# Altium PCB Gateway.PcbDoc
Units mm, origin at the board's own origin, x right, y up, seen from the top; angles counter-clockwise.
Board outline 74.09 x 59.44 mm, 2 copper layers (Top Layer, Bottom Layer); 20 components, 15 nets, 102 pads, 9 vias.
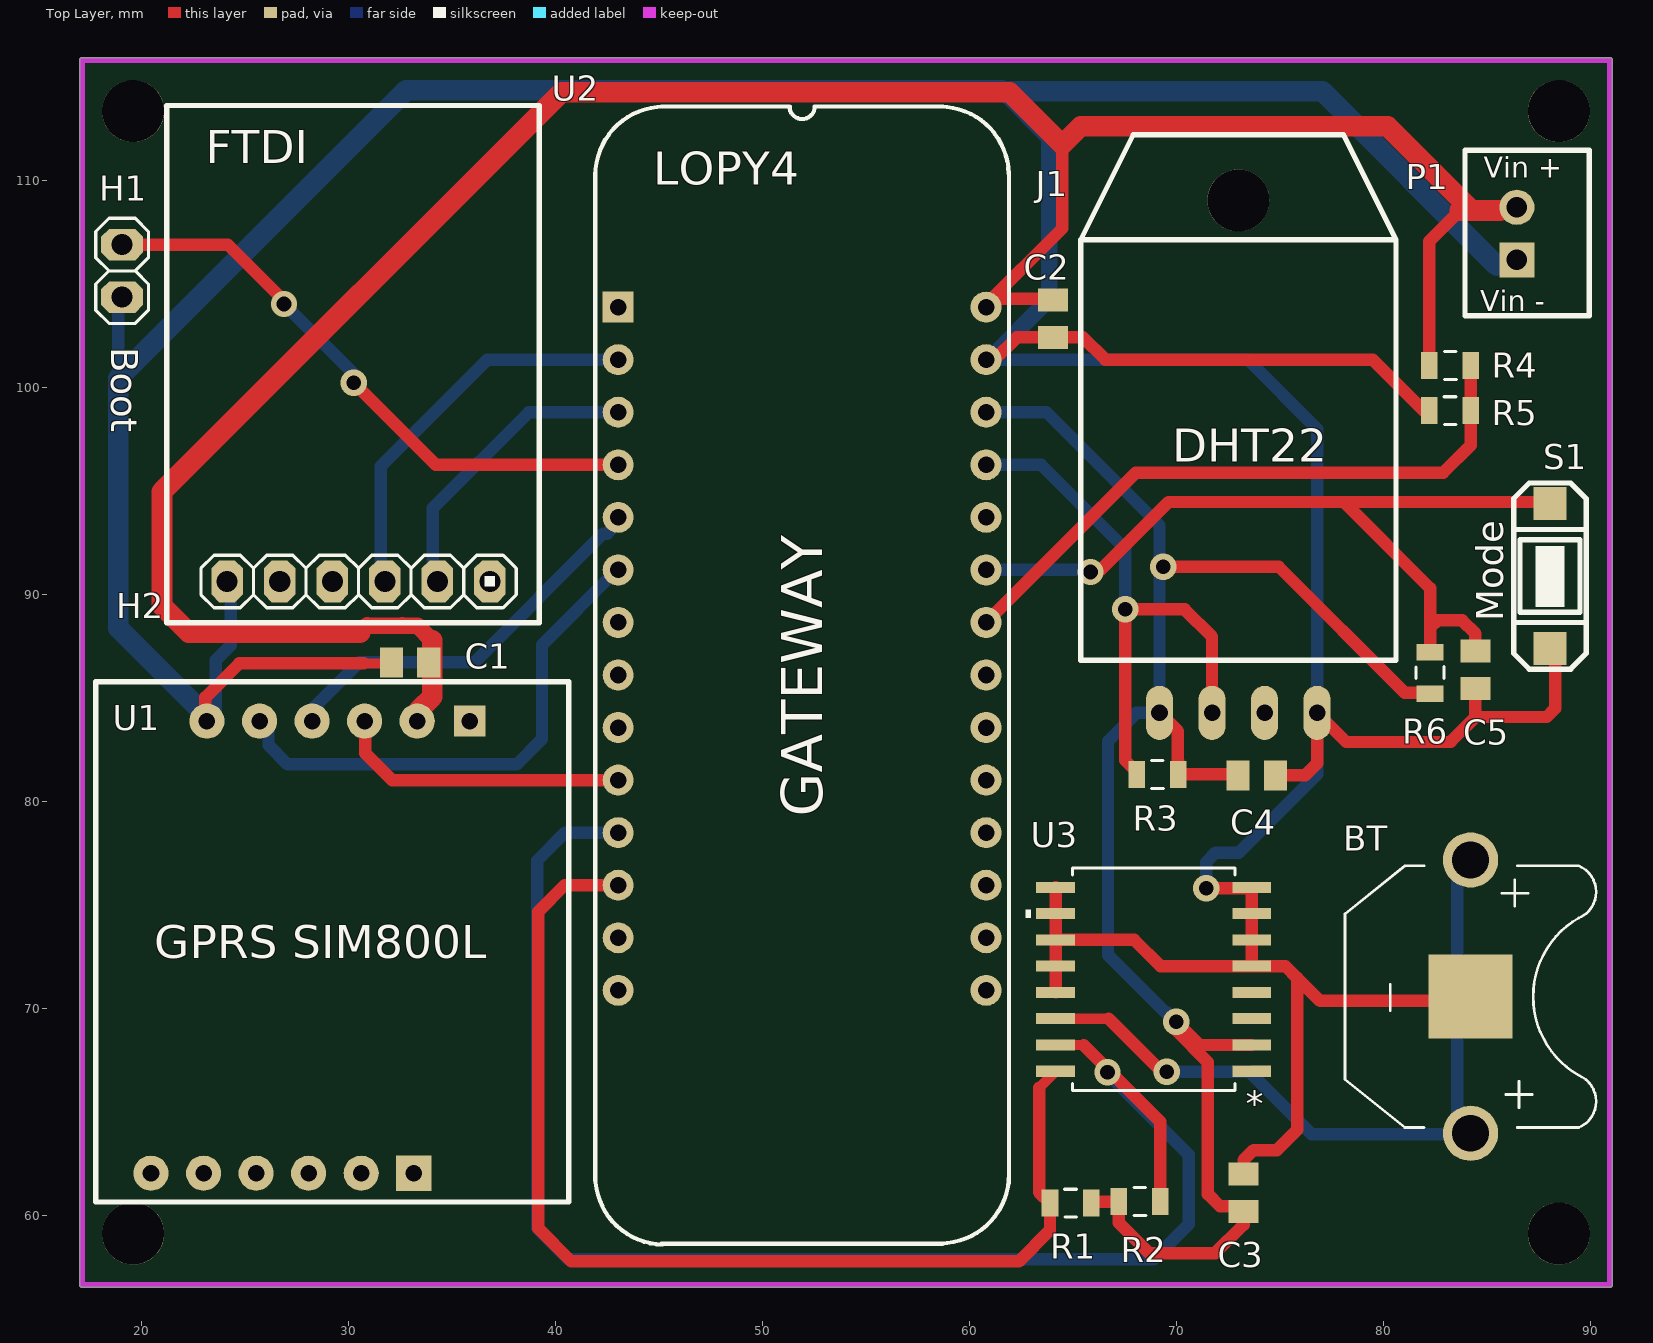
[diagram p0: Top Layer view]
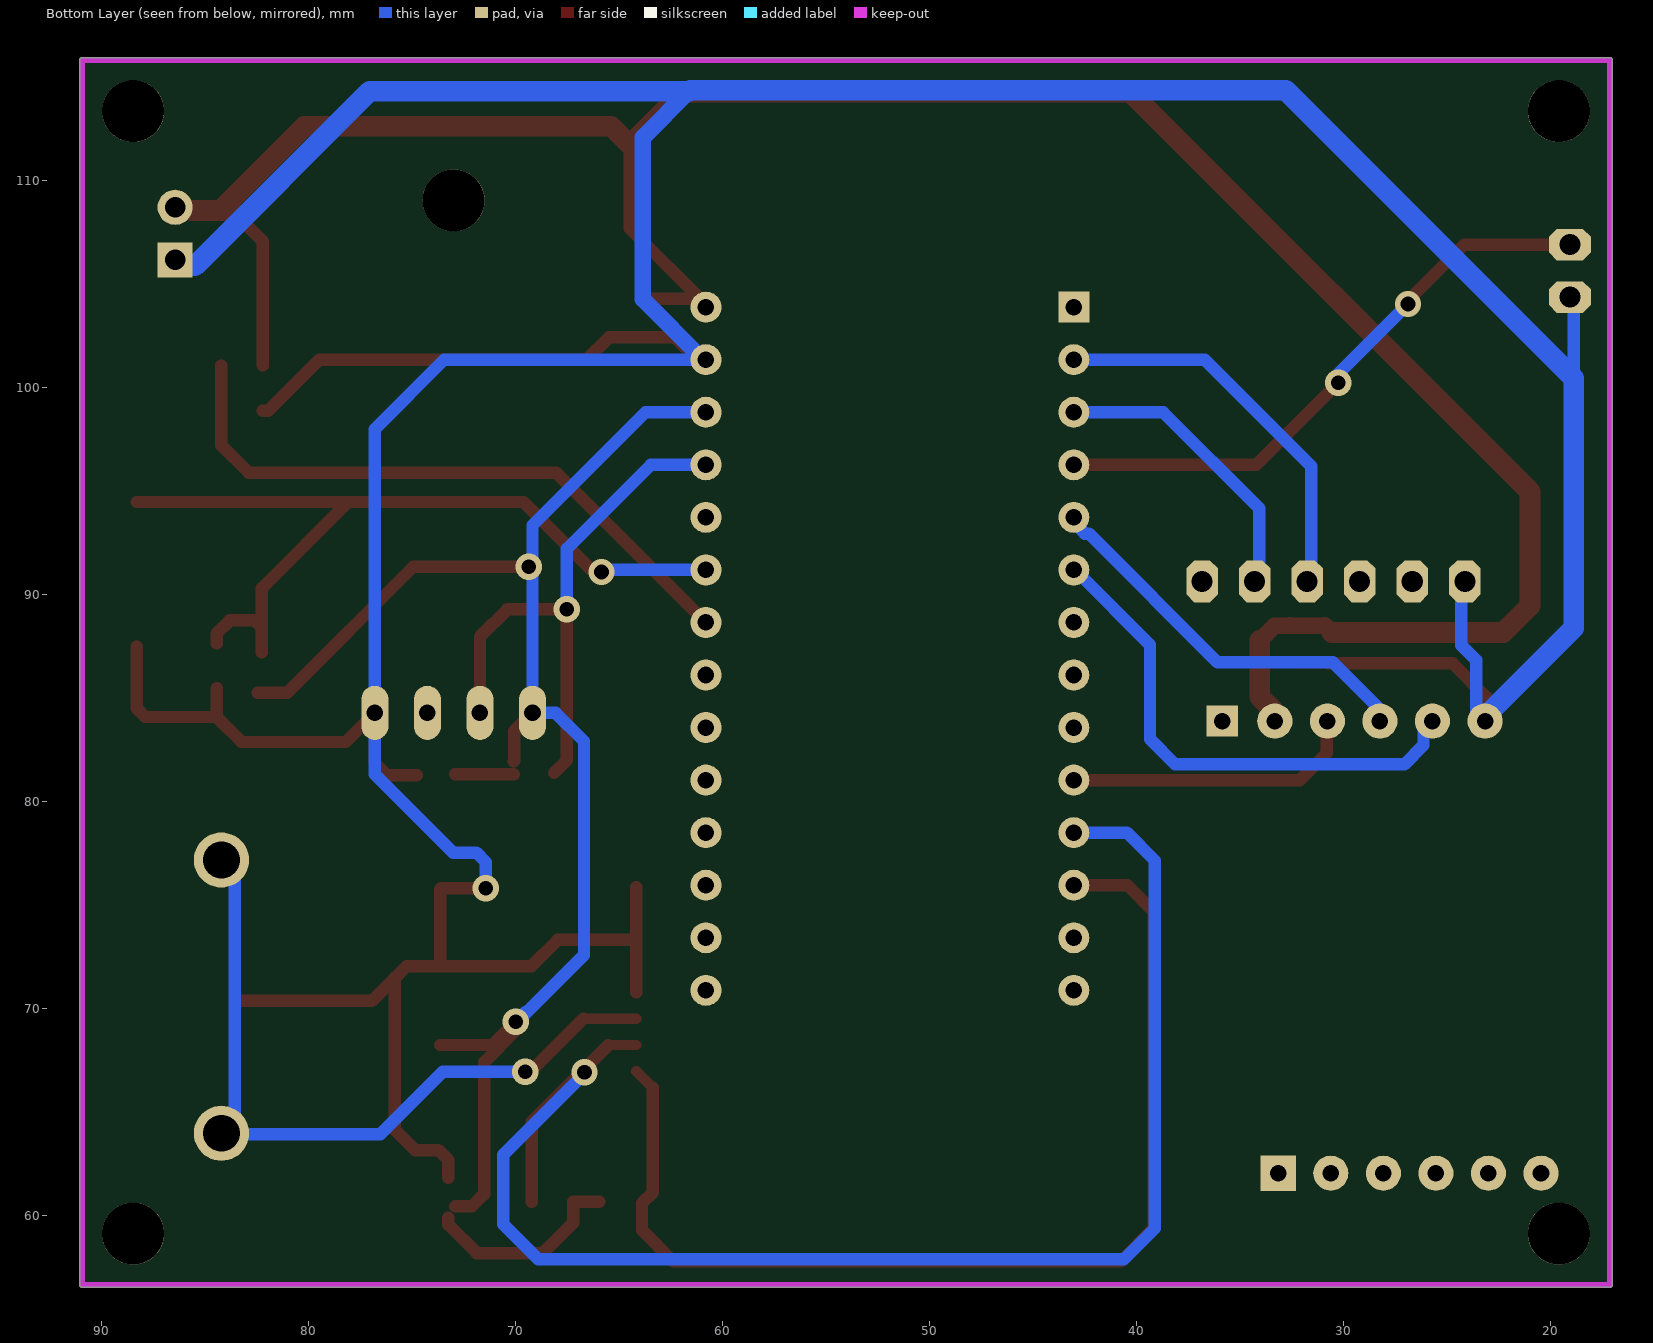
[diagram p1: Bottom Layer view, seen from below]
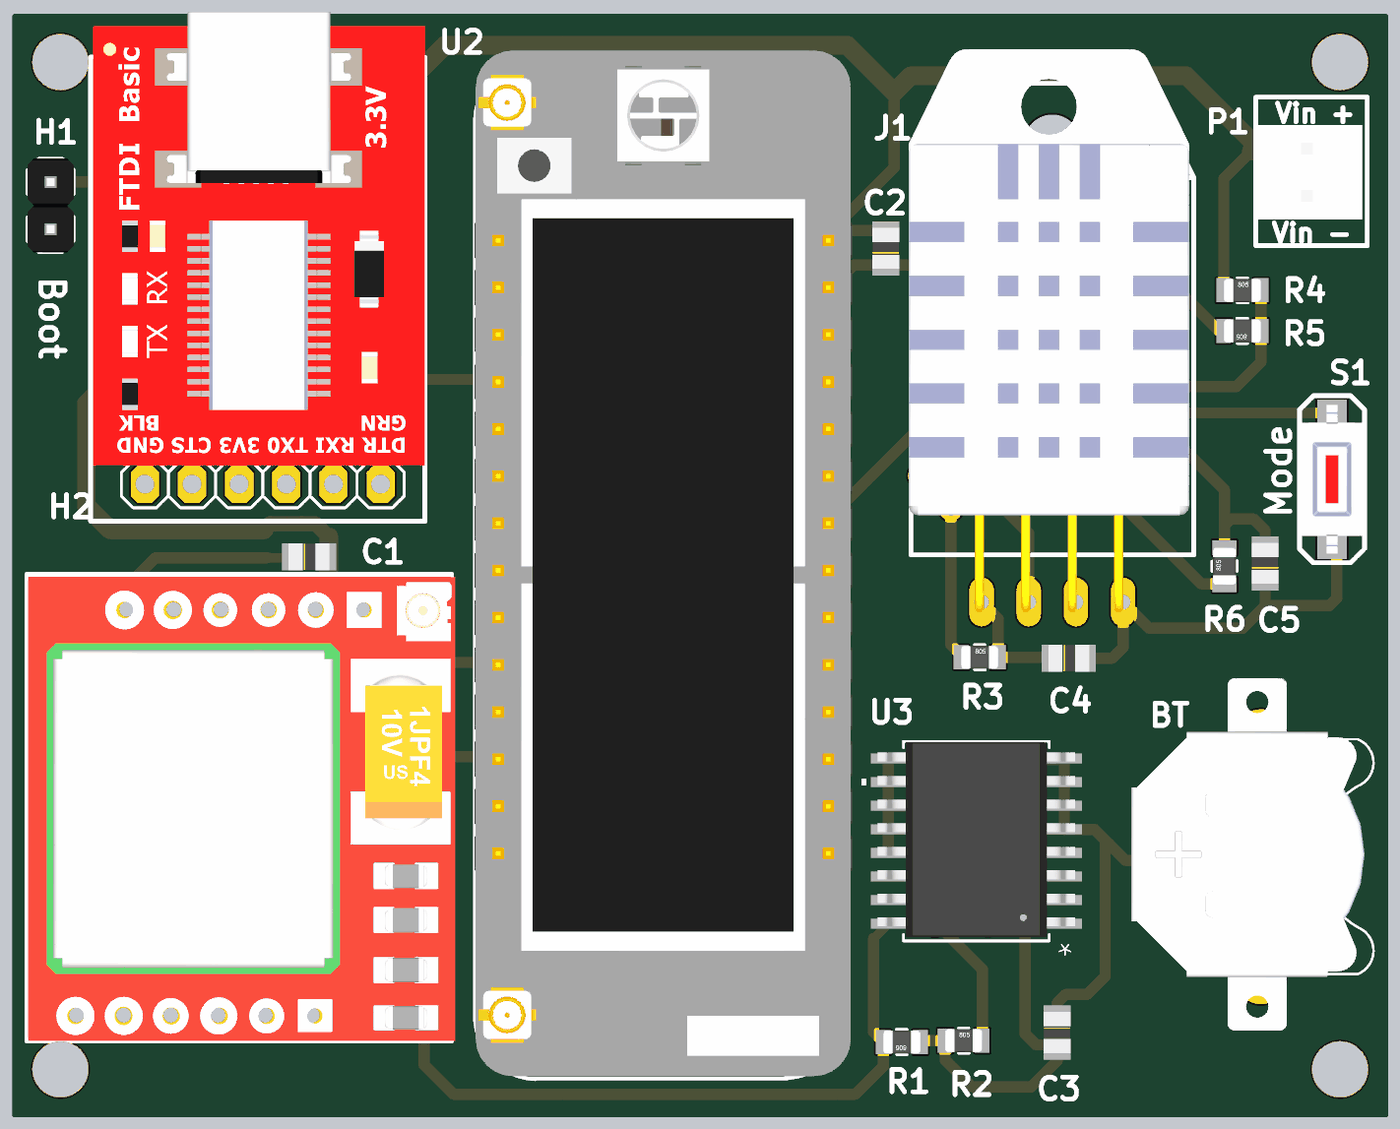
[diagram p2: 3D render of the assembled board from above, using the file's embedded part models]

## Layer stack, top to bottom
Top Solder: solder mask 0.0102, Solder Resist, Dk 3.5
Top Layer: signal copper 0.0356
Dielectric 1: dielectric 0.32, FR-4, Dk 4.8
Bottom Layer: signal copper 0.0356
Bottom Solder: solder mask 0.0102, Solder Resist, Dk 3.5

## Board outline
17.12,56.515 cw(c17.12,56.642) 16.992,56.642 16.992,115.824 cw(c17.12,115.824) 17.12,115.951 90.957,115.951 cw(c90.957,115.824) 91.085,115.824 91.085,56.642 cw(c90.957,56.642) 90.957,56.515

## Design rules (kind name [scope] priority, off if disabled: settings)
Clearance [All] p1: gap=0.7
PolygonConnect [All] p1: connectstyle=Relief reliefconductorwidth=0.254 reliefentries=4 polygonreliefangle="90 Angle" airgapwidth=0.254
RoutingVias [All] p1: holewidth=0.711 width=1.27 viastyle="Through Hole" minholewidth=0.711 minwidth=1.27 maxholewidth=0.711 maxwidth=1.27
SolderMaskExpansion [All] p1: expansion=0.102
Width [All] p1: maxlimit=1 minlimit=0.4 preferedwidth=0.6 minimp=50.000000 maximp=50.000000 favimp=50.000000
30 further rules are at their usual default settings.

## Components (designator, comment, footprint, x,y, rotation, side; value= is the part's Value field where it differs from the comment)
BT "BK-5091" BAT_BK-5091 84.226,70.561 r270 top
C1 "08055C104KAT2A" CAP_X7R_0805_AVX 32.969,86.716 r0 top
C2 "08055C104KAT2A" CAP_X7R_0805_AVX 64.033,103.327 r90 top
C3 "08055C104KAT2A" CAP_X7R_0805_AVX 73.254,61.087 r270 top
C4 "08055C104KAT2A" CAP_X7R_0805_AVX 73.889,81.255 r0 top
C5 "08055C104KAT2A" CAP_X7R_0805_AVX 84.455,86.36 r90 top
H1 "Header" "Header 1X2" 19.05,104.369 r90 top
H2 "sparkfunFTDI" sparkfunFTDI 29.21,90.627 r0 top
J1 "DHT22" DHT22 73,84.277 r0 top
P1 "Header 2" BORNERA25-2 86.462,106.172 r90 top
R1 "Res1" 0805 64.897,60.579 r180 top
R2 "Res2" 0805 68.224,60.655 r0 top
R3 "Res3" 0805 69.088,81.305 r0 top
R4 "Res4" 0805 83.236,101.067 r0 top
R5 "Res5" 0805 83.236,98.882 r180 top
R6 "Res1" 0805 82.271,86.208 r90 top
S1 "SW-PB" BUTTON-1-SMD 88.062,94.64 r0 top
U1 "GPRS_SIM800L" PCBComponent_1 22.987,89.332 r270 top
U2 "LoPy 4" LoPy 51.918,87.376 r270 top
U3 "ds3231" 21-0042B_16_MXM 68.91,71.399 r180 top

## Footprints (in the part's own frame and the unit in brackets; to place one, negate y for a bottom-side part, rotate by r counter-clockwise, add the part's x,y. Pads: shape width x height; smd on the part's side, far side on the other; paste and mask are expansions set on the pad)
21-0042B_16_MXM [mil]
  rect 74x21 smd paste+0 mask+0: 1(-186.5,175) 2(-186.5,125) 3(-186.5,75) 4(-186.5,25) 5(-186.5,-25) 6(-186.5,-75) 7(-186.5,-125) 8(-186.5,-175) 9(186.5,-175) 10(186.5,-125) 11(186.5,-75) 12(186.5,-25) 13(186.5,25) 14(186.5,75) 15(186.5,125) 16(186.5,175)
  silkscreen extent -155,-212 244,212, body extent -209,-210 209,203, height 104
0805 [mm] "Chip Resistor, Empaque 0805"
  rect 0.8x1.3 smd: 1(-1,0) 2(1,0)
  silkscreen extent -0.27,-0.67 0.3,0.67, body extent -1,-0.63 1,0.62, height 0.78
BAT_BK-5091 [mm]
  round 2.67 hole 1.78: 1+(-6.605,0) 2+(6.605,0)
  rect 4.06x4.06 smd: NEG(0,0)
  silkscreen extent -6.33,-6.07 6.33,6.07, body extent -9.63,-6.99 9.37,5.59, height 3.22
BORNERA25-2 [mm]
  rect 1.7x1.7 hole 1: 1(0,0)
  round 1.7 hole 1: 2(2.54,0)
  silkscreen extent -2.7,-3.5 5.3,2.5, body extent -1.29,-3.22 3.79,2.62, height 10.1
BUTTON-1-SMD [mm]
  rect 1.6x1.6 smd: 1(0,-0.25) 2(0,-7.25)
  silkscreen extent -1.75,-8.25 1.75,0.75, body extent -1.8,-7.75 1.8,0.25, height 2.5
CAP_X7R_0805_AVX [mil]
  rect 44x57 smd paste+0 mask+0: 1(-35.5,0) 2(35.5,0)
  body extent -44,-29 44,29, height 37
DHT22 [mm]
  oval 1.308x2.616 hole 0.8: DATA(-1.27,0) GND(3.81,0) NC(1.27,0) VDD(-3.81,0)
  round 3 hole 3 unplated: ""(0,24.765)
  silkscreen extent -7.62,2.54 7.62,27.94, body extent -7.73,-0.57 7.37,29.78, height 7.73
"Header 1X2" [mil] "Conector Header 1 linea 2 terminales"
  oct 60x80 hole 40: 1(0,0) 2(100,0)
  silkscreen extent -50,-50 150,50, body extent -50,-49 150,49, height 341
LoPy [mm] "DIP, Plastic; 28 Leads; Row Spacing 15.24 mm; Pitch 2.54 mm"
  rect 1.5x1.5 hole 0.8: 1(-16.51,-8.89)
  round 1.5 hole 0.8: 2(-13.97,-8.89) 3(-11.43,-8.89) 4(-8.89,-8.89) 5(-6.35,-8.89) 6(-3.81,-8.89) 7(-1.27,-8.89) 8(1.27,-8.89) 9(3.81,-8.89) 10(6.35,-8.89) 11(8.89,-8.89) 12(11.43,-8.89) 13(13.97,-8.89) 14(16.51,-8.89) 15(16.51,8.89) 16(13.97,8.89) 17(11.43,8.89) 18(8.89,8.89) 19(6.35,8.89) 20(3.81,8.89) 21(1.27,8.89) 22(-1.27,8.89) 23(-3.81,8.89) 24(-6.35,8.89) 25(-8.89,8.89) 26(-11.43,8.89) 27(-13.97,8.89) 28(-16.51,8.89)
  silkscreen extent -26.21,-10 28.8,10, body extent -26.61,-10.03 28.64,10.29, height 6.2
PCBComponent_1 [mm]
  rect 1.5x1.5 hole 0.8: 1(5.453,12.866)
  round 1.7 hole 0.8: 2(5.453,10.326) 3(5.453,7.786) 4(5.453,5.246) 5(5.453,2.706) 6(5.453,0.166) 7(27.305,-2.54) 8(27.305,0) 9(27.305,2.54) 10(27.305,5.08) 11(27.305,7.62)
  rect 1.7x1.7 hole 0.8: 12(27.305,10.16)
  silkscreen extent 3.56,-5.21 28.7,17.65, body extent 3.68,-5.15 28.7,17.85, height 5.82
sparkfunFTDI [mil] "Conector Header 1 linea 6 terminales"
  oct 60x80 hole 40: 1(-200,0) 2(-100,0) 3(0,0) 4(100,0) 5(200,0) 6(300,0)
  silkscreen extent -315,-79 394,906, body extent -310,39 394,1001, height 306

## Part data
BT: "Battery Retainer Coin, 11.6mm 1 Cell PC Pin"
C1 C2 C3 C4 C5: "No Description Available"
H1: library part "Header 2", "Header 2 pin"
H2: "Header, 6-Pin"
J1: "Capacitive-type humidity and temperature module/sensor"
P1: "Header, 2-Pin"
R1 R6: "Resistor"
R2 R3 R4 R5: library part Res1, "Resistor"
S1: "Switch"
U1: library part Component_1
U2: library part LoPy, "LoPy, Wifi and Bluetooth Microcontroller, 4M RAM, 4 MHz, 28-Pin, 3.0 to 5.5V Supply Range, Commercial Temperature"
U3: library part ds3231s#, "No Description Available"

## Free pads (board coordinates)
  round 3 hole 3: 2(19.583,59.106) 2(19.583,113.36) 2(88.494,59.106) 2(88.494,113.36)

## Via types
v1: diameter 1.27, hole 0.711, Top Layer to Bottom Layer, 9 vias

## Nets (pads, with @x,y where several pads share a name; then routed paths per layer and width w, separated by ;. In a path a pad name is that pad's centre, name@x,y a point inside that pad or via, vN(x,y) a via of type N, cw(c..) or ccw(c..) an arc to the next point about the centre after c; other vN are vias at no path point)
3.3V: C3.2 C4.1 J1.VDD R1.1 R2.1 R3.2 R6.1 U2.26 U3.2 | length 83.3
  Top Layer w0.6: R1.1@65.973,60.655 R2.1 67.224,59.623 68.682,58.166 71.882,58.166 73.254,59.538 C3.2@73.254,59.868 ; J1.VDD 70.076,83.391 70.076,81.969 R3.2@70.104,81.94 ; v1(69.367,91.338) 74.955,91.338 81.035,85.258 R6.1@82.474,85.258 ; v1@69.952,68.961 71.53,67.383 71.53,61.016 72.115,60.43 72.913,60.43 C3.2@72.923,60.42 ; v1(70.002,69.342) 71.12,68.224 U3.2 ; R3.2 C4.1@72.936,81.305
  Bottom Layer w0.6: U2.26@60.681,98.806 63.729,98.806 69.19,93.345 J1.VDD 68.072,84.277 66.7,82.906 66.7,72.568 69.545,69.723 69.545,69.799 v1(70.002,69.342)
BATTERY_LEVEL: R4.2 R5.1 U2.22 | length 30.8
  Top Layer w0.6: U2.22 68.047,95.885 82.906,95.885 84.236,97.215 R5.1 R4.2
DHT22_SIGNAL: J1.DATA R3.1 U2.25 | length 28.1
  Top Layer w0.6: R3.1@68.151,81.369 67.536,81.984 v1(67.536,89.281) 70.409,89.281 71.73,87.96 J1.DATA
  Bottom Layer w0.6: U2.25@60.681,96.266 63.475,96.266 67.536,92.205 v1(67.536,89.281)
GND: BT.NEG C1.1 C2.1 C3.1 C4.2 C5.1 H1.1 H2.1 J1.GND P1.1 R5.2 S1.2 U1.6 U2.27 U3.5 U3.6 U3.7 U3.8 U3.9 U3.10 U3.11 U3.12 U3.13 | length 262
  Top Layer w0.5: 30.734,86.665 C1.1@32.207,86.665
  Top Layer w0.6: U1.6@23.077,83.676 23.077,85.027 24.714,86.665 30.734,86.665 ; U2.27@60.681,101.346 U2.27 61.214,101.346 62.293,102.425 65.494,102.425 66.573,101.346 79.492,101.346 81.956,98.882 R5.2 ; U3.13 U3.12 U3.11 ; U3.9 U3.10 U3.11 ; v1(71.45,75.794) 73.596,75.794 73.647,75.743 U3.7 U3.6 U3.5 ; C3.1@73.254,61.798 73.254,62.662 73.736,63.144 74.867,63.144 75.844,64.122 75.844,71.468 ; C4.2 76.225,81.255 76.81,81.839 J1.GND 78.218,82.869 83.261,82.869 83.261,82.88 84.459,84.078 ; BT.NEG@83.21,70.357 76.956,70.357 75.844,71.468 ; C5.1@84.459,85.458 84.459,84.078 ; S1.2@88.316,87.467 88.316,84.488 87.905,84.078 84.459,84.078 ; U3.11 67.97,73.304 69.24,72.034 U3.5 ; U3.5 73.651,72.031 75.281,72.031 75.844,71.468
  Bottom Layer w0.6: 18.871,100.456 18.871,104.19 H1.1 ; U1.6@23.077,83.676 U1.6@23.077,84.158 ; U1.6@23.585,83.65 23.585,86.831 24.308,87.554 24.308,90.145 H2.1@24.13,90.322 ; U2.27@60.935,101.346 73.457,101.346 76.81,97.993 J1.GND 76.81,81.305 73.025,77.521 71.907,77.521 71.45,77.064 v1(71.45,75.794)
  Bottom Layer w0.8: U2.27@60.935,101.346 63.856,104.267 63.856,112.09 61.62,114.325
  Bottom Layer w1: U1.6@23.077,84.158 18.871,88.364 18.871,100.456 32.791,114.376 61.57,114.376 ; 61.62,114.325 77.064,114.325 85.509,105.88
"MODE BUTTOM": C5.2 R6.2 S1.1 U2.23 | length 40.5
  Top Layer w0.6: v1@66.345,91.186 69.625,94.467 78.105,94.467 ; R6.2 82.271,88.392 ; C5.2@84.455,87.63 84.455,88.113 83.82,88.748 82.626,88.748 82.271,88.392 ; S1.1@88.316,94.467 78.105,94.467 ; 78.105,94.467 82.271,90.301 82.271,88.392
  Bottom Layer w0.6: U2.23 65.758,91.186 v1(65.859,91.084)
NetBT_1+: BT.1+ BT.2+ U3.14 | length 34.4
  Top Layer w0.5: U3.14 66.726,69.494
  Top Layer w0.6: 66.726,69.494 v1@69.329,66.891
  Bottom Layer w0.6: v1(69.545,66.929) 73.533,66.929 76.556,63.906 BT.2+@83.21,63.906 ; BT.2+@83.591,63.905 BT.1+@83.591,77.115
P2: H1.2 U2.4 | length 29
  Top Layer w0.6: H1.2 24.155,106.909 v1@27.178,103.886 ; v1(30.251,100.228) 34.214,96.266 U2.4
  Bottom Layer w0.6: v1(26.873,104.038) 30.251,100.66 v1(30.251,100.228)
RESETGPRS: U1.3 U2.10 | length 14.1
  Top Layer w0.6: U1.3@31.205,83.65 30.81,83.256 30.81,82.321 32.106,81.026 U2.10@42.901,81.026
RXD_CONVERTER: H2.5 U2.3 | length 13.9
  Bottom Layer w0.6: H2.5@34.061,91.11 34.061,94.158 38.71,98.806 U2.3
RXD_GPRS: U1.4 U2.5 | length 19.6
  Bottom Layer w0.6: U1.4@28.665,83.65 28.665,83.726 28.372,84.019 28.372,84.582 30.505,86.716 36.082,86.716 42.303,92.936 42.492,92.936 42.901,93.345 U2.5@42.901,93.726
SCL_RTC: R1.2 U2.12 U3.16 | length 53.9
  Top Layer w0.5: 63.373,66.154 U3.16
  Top Layer w0.6: U2.12@42.901,75.881 42.901,75.946 40.437,75.946 39.167,74.676 39.167,59.36 40.758,57.769 62.392,57.769 63.897,59.274 R1.2 63.373,61.103 63.373,66.154
SDA_RTC: R2.2 U2.11 U3.15 | length 74.3
  Top Layer w0.5: U3.15@64.176,68.221 65.527,68.221
  Top Layer w0.6: 65.527,68.221 69.224,64.524 R2.2
  Bottom Layer w0.6: U2.11@42.901,78.486 40.462,78.486 39.116,77.14 39.116,59.36 40.615,57.861 68.91,57.861 70.612,59.563 70.612,62.916 v1@66.65,66.878
  other v1: 66.675,66.904
TXD_CONVERTER: H2.4 U2.2 | length 18.5
  Bottom Layer w0.6: H2.4@31.547,91.135 31.547,96.19 36.703,101.346 U2.2@42.901,101.346
TXD_GPRS: U1.5 U2.6 | length 24.7
  Bottom Layer w0.6: U1.5@26.125,83.65 26.125,82.714 27.051,81.788 38.125,81.788 39.345,83.007 39.345,87.565 42.901,91.121 U2.6@42.901,91.186
VCC: C1.2 C2.2 P1.2 R4.1 U1.2 U2.28 | length 121.2
  Top Layer w0.6: U1.2@33.426,84.439 33.426,83.969 U1.2@33.745,83.65 ; C2.2@63.729,104.292 61.316,104.292 60.909,103.886 60.681,103.886 64.491,107.696 64.491,111.735 ; R4.1 82.236,107.077 83.718,108.56
  Top Layer w0.8: 30.55,88.163 30.906,88.519 30.936,88.489 32.564,88.489 32.594,88.519 32.625,88.489 33.33,88.489 34.036,87.782
  Top Layer w1: 30.55,88.163 22.276,88.163 20.98,89.459 20.98,94.971 40.284,114.275 61.951,114.275 64.491,111.735 65.38,112.624 80.213,112.624 84.277,108.56 ; U1.2@33.426,84.439 34.036,85.049 34.036,87.782 ; 83.718,108.56 P1.2@85.649,108.56
pads on no net: H2.2 H2.3 H2.6 J1. J1.NC U1.1 U1.7 U1.8 U1.9 U1.10 U1.11 U1.12 U2.1 U2.7 U2.8 U2.9 U2.13 U2.14 U2.15 U2.16 U2.17 U2.18 U2.19 U2.20 U2.21 U2.24 U3.1 U3.3 U3.4

## Keep-outs
Keep-Out Layer:
  lines w0.254: 17.12,56.642 17.12,115.824 90.957,115.824 90.957,56.642 17.12,56.642

## Silkscreen, mask and mechanical layers (free items; w line width, h text height)
Top Overlay:
  text "FTDI" at 23.089,110.846 h1.6
  text "Vin +" at 84.861,110.134 h1
  text "LOPY4" at 44.729,109.804 h1.6
  text "Vin -" at 84.684,103.683 h1
  text "Boot" at 18.517,101.956 h1.3 r270
  text "DHT22" at 69.799,96.418 h1.6
  text "Mode" at 85.801,88.697 h1.3 r90
  text "GATEWAY" at 52.883,79.248 h2 r90
  text "GPRS SIM800L" at 20.599,72.415 h1.6

## Text inside footprints (layer, text, board x,y; h text height)
U3: Top Overlay "*" at 74.219,66.548 h1.27 r180; Mechanical 13 "*" at 72.644,67.501 h1.27 r180